# EAGLE board grabBAKUP (EAGLE 6.6.0)
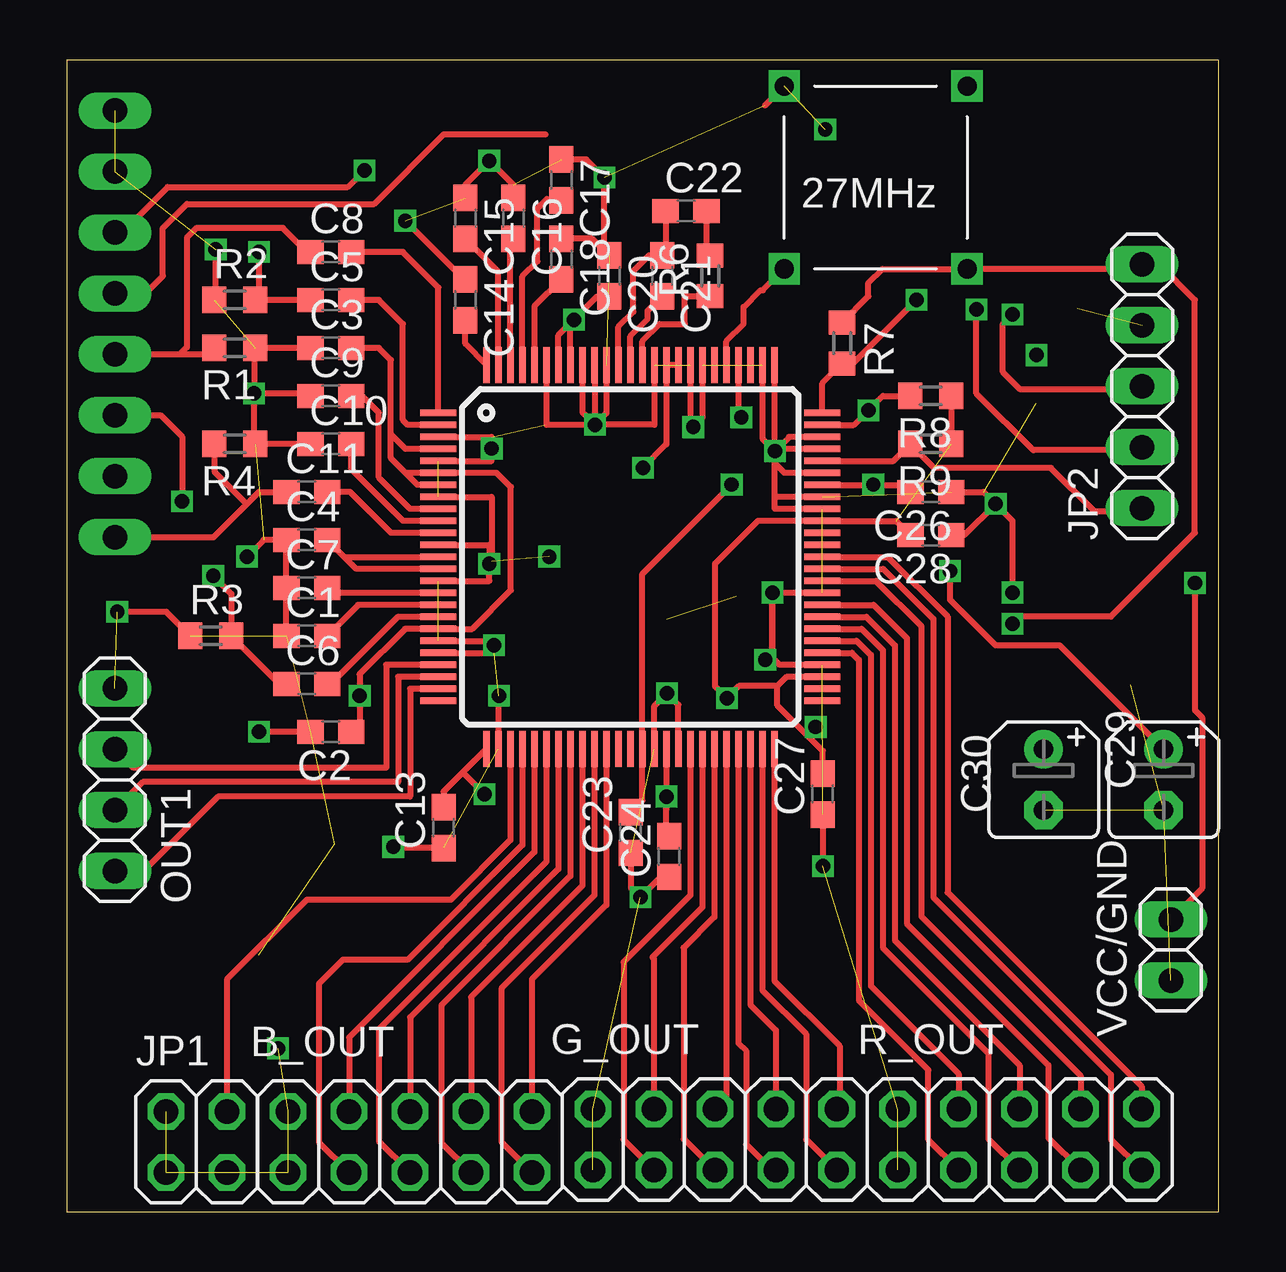
[diagram p0: board, top side]
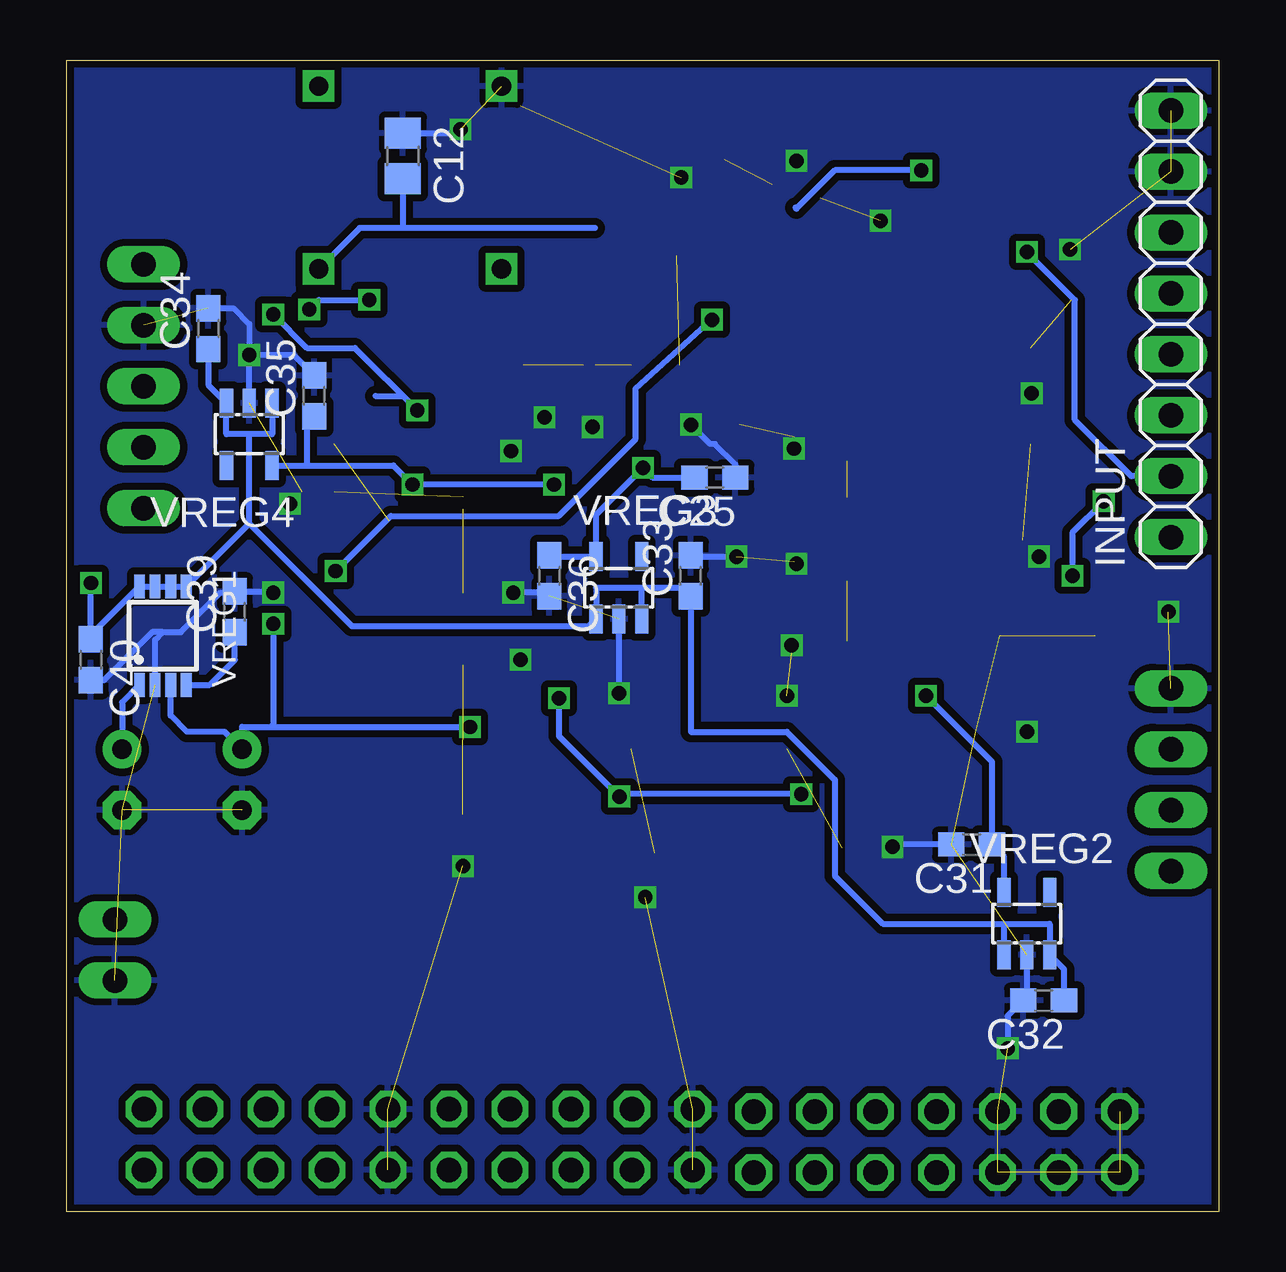
[diagram p1: board, bottom side, seen from below]

Size 48 x 48 mm. Coordinates in mm from the lower left corner, seen from the top.
Outline: 0,0 48,0 48,48 0,48 0,0
Copper layers (1*16): Top 0.035mm / dielectric 1.5mm / Bottom 0.035mm
Design rules "SeeedStudio_2layer_DRU_no_angle_20140221": minimum track width 6mil, minimum drill 12mil, track to track 6mil, track to pad 6mil, pad to pad 6mil, via to via 6mil, smd to smd 0mil, copper to edge 10mil, drill to drill 10mil, minimum pad ring 10mil, minimum via ring 6mil, stop-mask expansion 2mil, vias tented up to drill 100mil, thermal gap 10mil

## Footprints (pad centres in the part's own frame; a part is rotated, then mirrored left to right if it is on the bottom)
DIP4 = drill 0.8 square: P1 -3.81,-3.81; P4 3.81,-3.81; P5 3.81,3.81; P8 -3.81,3.81
2X05 = drill 1.016 octagon: 1 -5.08,-1.27; 2 -5.08,1.27; 3 -2.54,-1.27; 4 -2.54,1.27; 5 0,-1.27; 6 0,1.27; 7 2.54,-1.27; 8 2.54,1.27; 9 5.08,-1.27; 10 5.08,1.27
C0603 = smd 1.1 x 1: 1 -0.85,0; 2 0.85,0
C0805 = smd 1.3 x 1.5: 1 -0.95,0; 2 0.95,0
B45181A = drill 0.813 pad 1.6: + -1.27,0 | drill 0.813 pad 1.6 octagon: - 1.27,0
1X08 = drill 1.016 long: 1 -8.89,0; 2 -6.35,0; 3 -3.81,0; 4 -1.27,0; 5 1.27,0; 6 3.81,0; 7 6.35,0; 8 8.89,0
2X02 = drill 1.016 octagon: 1 -1.27,-1.27; 2 -1.27,1.27; 3 1.27,-1.27; 4 1.27,1.27
1X05 = drill 1.016 long: 1 -5.08,0; 2 -2.54,0; 3 0,0; 4 2.54,0; 5 5.08,0
1X04 = drill 1.016 long: 1 -3.81,0; 2 -1.27,0; 3 1.27,0; 4 3.81,0
R0603 = smd 1 x 1.1: 1 -0.85,0; 2 0.85,0
TQFP100 = smd 1.5 x 0.274: 1 -8,6; 2 -8,5.5; 3 -8,5; 4 -8,4.5; 5 -8,4; 6 -8,3.5; 7 -8,3; 8 -8,2.5; 9 -8,2; 10 -8,1.5; 11 -8,1; 12 -8,0.5; 13 -8,0; 14 -8,-0.5; 15 -8,-1; 16 -8,-1.5; 17 -8,-2; 18 -8,-2.5; 19 -8,-3; 20 -8,-3.5; 21 -8,-4; 22 -8,-4.5; 23 -8,-5; 24 -8,-5.5; 25 -8,-6; 51 8,-6; 52 8,-5.5; 53 8,-5; 54 8,-4.5; 55 8,-4; 56 8,-3.5; 57 8,-3; 58 8,-2.5; 59 8,-2; 60 8,-1.5; 61 8,-1; 62 8,-0.5; 63 8,0; 64 8,0.5; 65 8,1; 66 8,1.5; 67 8,2; 68 8,2.5; 69 8,3; 70 8,3.5; 71 8,4; 72 8,4.5; 73 8,5; 74 8,5.5; 75 8,6 | smd 0.274 x 1.5: 26 -6,-8; 27 -5.5,-8; 28 -5,-8; 29 -4.5,-8; 30 -4,-8; 31 -3.5,-8; 32 -3,-8; 33 -2.5,-8; 34 -2,-8; 35 -1.5,-8; 36 -1,-8; 37 -0.5,-8; 38 0,-8; 39 0.5,-8; 40 1,-8; 41 1.5,-8; 42 2,-8; 43 2.5,-8; 44 3,-8; 45 3.5,-8; 46 4,-8; 47 4.5,-8; 48 5,-8; 49 5.5,-8; 50 6,-8; 76 6,8; 77 5.5,8; 78 5,8; 79 4.5,8; 80 4,8; 81 3.5,8; 82 3,8; 83 2.5,8; 84 2,8; 85 1.5,8; 86 1,8; 87 0.5,8; 88 0,8; 89 -0.5,8; 90 -1,8; 91 -1.5,8; 92 -2,8; 93 -2.5,8; 94 -3,8; 95 -3.5,8; 96 -4,8; 97 -4.5,8; 98 -5,8; 99 -5.5,8; 100 -6,8
1X02 = drill 1.016 long: 1 -1.27,0; 2 1.27,0
MSOP8 = smd 0.45 x 1: 1 -0.975,-2.05; 2 -0.325,-2.05; 3 0.325,-2.05; 4 0.975,-2.05; 5 0.975,2.05; 6 0.325,2.05; 7 -0.325,2.05; 8 -0.975,2.05
SOT23-5L = smd 0.55 x 1.2: 1 -0.95,-1.3; 2 0,-1.3; 3 0.95,-1.3; 4 0.95,1.3; 5 -0.95,1.3

## Placement (x,y rotation side)
27MHZ  ACHL-27MHZ-EK  [DIP4]  33.7,43.1 180 top
B_OUT  [2X05]  14.3,2.9 180 top
C1  10n  [C0603]  10,24 0 top
C2  0.1u  [C0603]  11,20 180 top
C3  10n  [C0603]  11,36 0 top
C4  0.1u  [C0603]  10,28 0 top
C5  0.1u  [C0603]  11,38 0 top
C6  0.1u  [C0603]  10,22 0 top
C7  10n  [C0603]  10,26 0 top
C8  1n  [C0603]  11,40 0 top
C9  10n  [C0603]  11,34 0 top
C10  10n  [C0603]  11,32 0 top
C11  0.1u  [C0603]  10,30 0 top
C12  10n  [C0805]  34,44 270 bottom
C13  0.1u  [C0603]  15.7,16 90 top
C14  10n  [C0603]  16.6,38 270 top
C15  1n  [C0603]  16.6,41.4 270 top
C16  10n  [C0603]  18.6,41.4 270 top
C17  1n  [C0603]  20.6,43 270 top
C18  10n  [C0603]  20.6,39.7 270 top
C20  0.1u  [C0603]  22.6,39 270 top
C21  4.7n  [C0603]  24.8,39 270 top
C22  0.1u  [C0603]  25.8,41.7 0 top
C23  0.1u  [C0603]  23.5,15.8 90 top
C24  0.1u  [C0603]  25.1,14.8 90 top
C25  0.1u  [C0603]  21,30.6 180 bottom
C26  0.1u  [C0603]  36,30 180 top
C27  0.1u  [C0603]  31.5,17.4 90 top
C28  0.1u  [C0603]  36,28.2 180 top
C29  2.2u  [B45181A]  45.7,18 270 top
C30  2.2u  [B45181A]  40.7,18 270 top
C31  1u  [C0603]  10.3,15.3 180 bottom
C32  1u  [C0603]  7.3,8.8 180 bottom
C33  1u  [C0603]  22,26.5 90 bottom
C34  1u  [C0603]  42.1,36.8 90 bottom
C35  1u  [C0603]  37.7,34 90 bottom
C36  1u  [C0603]  27.9,26.5 270 bottom
C39  470p  [C0603]  41,25 90 bottom
C40  1u  [C0603]  47,23 270 bottom
G_OUT  [2X05]  27,3 180 top
INPUT  [1X08]  2,37 90 bottom
JP1  [2X02]  5.4,2.9 0 top
JP2  [1X05]  44.8,34.4 90 top
OUT1  [1X04]  2,18 90 top
R1  75  [R0603]  7,36 180 top
R2  75  [R0603]  7,38 0 top
R3  75  [R0603]  6,24 0 top
R4  75  [R0603]  7,32 180 top
R6  1.5k  [R0603]  26.8,39 90 top
R7  2.2k  [R0603]  32.3,36.2 270 top
R8  2.2k  [R0603]  36,34 180 top
R9  2.2k  [R0603]  36,32 180 top
R_OUT  [2X05]  39.7,3 180 top
TVP7002  TVP7002  [TQFP100]  23.48,27.29 0 top
VCC/GND  [1X02]  46,10.9 90 top
VREG1  MIC5210MSOP8  [MSOP8]  44,24 0 bottom
VREG2  TLV70019SOT23-5L  [SOT23-5L]  8,12 0 bottom
VREG3  TLV70019SOT23-5L  [SOT23-5L]  25,26 0 bottom
VREG4  TLV70019SOT23-5L  [SOT23-5L]  40.4,32.4 180 bottom

## Library data of the parts
27MHZ TVP7002 VREG1-VREG4 = buffiscreengrab
B_OUT G_OUT INPUT JP1 JP2 OUT1 R_OUT VCC/GND = pinhead
C1-C11 C13-C18 C20-C36 C39 C40 R1-R4 R6-R9 = resistor
C12 = rcl

## Nets
+5V: C32.1 C33.1 C34.1 C40.1 VCC/GND.2 VREG1.5 VREG1.6 VREG1.7 VREG1.8 VREG2.1 VREG2.3 VREG3.1 VREG3.3 VREG4.1 VREG4.3
A33VDD: C20.2 C29.+ TVP7002.93 TVP7002.94 VREG1.1
AVDD: C2.1 C3.2 C31.1 TVP7002.4 TVP7002.6 TVP7002.7 TVP7002.19 VREG2.5
B0: B_OUT.1 TVP7002.36
B1: B_OUT.2 TVP7002.35
B2: B_OUT.3 TVP7002.34
B3: B_OUT.4 TVP7002.33
B4: B_OUT.5 TVP7002.32
B5: B_OUT.6 TVP7002.31
B6: B_OUT.7 TVP7002.30
B7: B_OUT.8 TVP7002.29
BIN: C6.1 INPUT.3 R3.2
CLK27: 27MHZ.P5 TVP7002.80
CSYNCIN: C8.1 INPUT.4 R1.2
DVDD: C23.2 C26.2 C35.1 TVP7002.39 TVP7002.69 VREG4.5
FIDOUT: OUT1.3 TVP7002.22
G0: G_OUT.1 TVP7002.50
G1: G_OUT.2 TVP7002.49
G2: G_OUT.3 TVP7002.48
G3: G_OUT.4 TVP7002.47
G4: G_OUT.5 TVP7002.46
G5: G_OUT.6 TVP7002.45
G6: G_OUT.7 TVP7002.44
G7: G_OUT.8 TVP7002.43
GIN: C5.1 INPUT.2 R2.2
GND: 27MHZ.P4 B_OUT.9 B_OUT.10 C1.1 C2.2 C3.1 C4.1 C7.1 C9.1 C10.1 C12.1 C13.1 C14.1 C15.1 C16.1 C17.1 C18.1 C20.1 C23.1 C24.1 C25.1 C26.1 C27.1 C28.1 C29.- C30.- C31.2 C32.2 C33.2 C34.2 C35.2 C36.2 C39.2 C40.2 G_OUT.9 G_OUT.10 INPUT.7 INPUT.8 JP1.1 JP1.2 JP1.3 JP2.4 OUT1.4 R1.1 R2.1 R3.1 R4.1 R_OUT.9 R_OUT.10 TVP7002.3 TVP7002.5 TVP7002.8 TVP7002.12 TVP7002.15 TVP7002.20 TVP7002.21 TVP7002.27 TVP7002.40 TVP7002.42 TVP7002.54 TVP7002.60 TVP7002.67 TVP7002.68 TVP7002.70 TVP7002.72 TVP7002.73 TVP7002.76 TVP7002.77 TVP7002.78 TVP7002.79 TVP7002.81 TVP7002.82 TVP7002.83 TVP7002.86 TVP7002.90 TVP7002.91 TVP7002.92 TVP7002.95 VCC/GND.1 VREG1.2 VREG2.2 VREG3.2 VREG4.2
HSOUT: OUT1.1 TVP7002.24
HSYNCIN: INPUT.6
IOVDD: 27MHZ.P8 C12.2 C13.2 C24.2 C27.2 C28.2 C30.+ JP2.5 R7.1 R8.1 R9.1 TVP7002.26 TVP7002.41 TVP7002.53 TVP7002.66 VREG1.3
N$1: C8.2 TVP7002.1
N$2: C5.2 TVP7002.2
N$3: C11.2 TVP7002.11
N$5: C7.2 TVP7002.16
N$6: C14.2 TVP7002.100
N$7: C15.2 TVP7002.99
N$8: C16.2 TVP7002.98
N$9: C9.2 TVP7002.9
N$10: C10.2 TVP7002.10
N$11: C1.2 TVP7002.17
N$12: C6.2 TVP7002.18
N$13: C17.2 TVP7002.97
N$14: C18.2 TVP7002.96
N$15: C39.1 VREG1.4
N$16: C4.2 TVP7002.13 TVP7002.14
N$28: C21.2 TVP7002.88
N$29: R6.1 TVP7002.87
N$34: C22.2 R6.2
N$35: C21.1 C22.1 TVP7002.89
PCLK: JP1.4 TVP7002.28
PLL_VDD: C25.2 C36.1 TVP7002.84 TVP7002.85 VREG3.5
R0: R_OUT.1 TVP7002.63
R1: R_OUT.2 TVP7002.62
R2: R_OUT.3 TVP7002.61
R3: R_OUT.4 TVP7002.59
R4: R_OUT.5 TVP7002.58
R5: R_OUT.6 TVP7002.57
R6: R_OUT.7 TVP7002.56
R7: R_OUT.8 TVP7002.55
RESET: JP2.1 R9.2 TVP7002.71
RIN: C11.1 INPUT.1 R4.2
SCL: JP2.3 R8.2 TVP7002.74
SDA: JP2.2 R7.2 TVP7002.75
VSOUT: OUT1.2 TVP7002.23
VSYNCIN: INPUT.5

## Tracks (layer width: path | path; a pad name or v marks a point on that pad's centre or on a via)
+5V  (via drill 0.6)
  Top 0.254: v47,26.2 47,20.9 47.3,20.6 47.3,13.47 VCC/GND.2
  Bottom 0.254: VREG1.8 VREG1.7 VREG1.6 VREG1.5 40.4,28.68 | VREG1.8 45.17,25.85 | VREG2.1 8.95,12 | 8.95,12 7.05,12 VREG2.3 6.45,10.1 C32.1 | VREG3.3 24.05,26 | 24.05,26 25.95,26 VREG3.1 26.25,24.4 36.12,24.4 40.4,28.68 | 24.05,26 22,26 C33.1 22,20 18,20 16,18 16,14 14,12 8.95,12 | VREG4.1 39.45,32.4 40.4,32.4 | 40.4,32.4 41.35,32.4 VREG4.3 42.1,34.45 C34.1 | 40.4,28.68 40.4,32.4 | VREG1.8 47,24.02 C40.1 v47,26.2
A33VDD  (via drill 0.6)
  Top 0.254: TVP7002.94 20.48,36.53 v21.12,37.17 | C29.+ 41.37,23.6 38.7,23.6 36.8,25.5 v36.8,26.7 | TVP7002.93 20.98,37.03 v21.12,37.17 | C20.2 22.1,38.15 v21.12,37.17
  Bottom 0.254: VREG1.1 45.7,21.23 C29.+ | v36.8,26.7 34.5,29 27.5,29 24.3,32.2 24.3,34.3 v21.12,37.17
AVDD  (via drill 0.6)
  Top 0.254: TVP7002.4 14.11,31.79 13.5,32.4 | 13.5,32.4 13.5,35.5 13,36 C3.2 | 14.11,30.79 TVP7002.6 17.91,30.79 18.5,30.2 18.5,25.9 16.89,24.29 TVP7002.19 14.09,24.29 12.2,22.4 v12.2,21.5 12.2,20.35 C2.1 | 14.11,30.79 13.5,31.4 13.5,32.4 | TVP7002.7 14.61,30.29 14.11,30.79
  Bottom 0.254: VREG2.5 8.95,14.8 C31.1 9.45,18.75 v12.2,21.5
B0
  Top 0.254: TVP7002.36 22.48,12.78 19.38,9.68 B_OUT.1
B1
  Top 0.254: TVP7002.35 21.98,13.18 18.1,9.3 18.1,2.91 B_OUT.2
B2
  Top 0.254: TVP7002.34 21.48,13.58 16.84,8.94 B_OUT.3
B3
  Top 0.254: TVP7002.33 20.98,13.98 15.6,8.6 15.6,2.87 B_OUT.4
B4
  Top 0.254: TVP7002.32 20.48,14.28 14.3,8.1 B_OUT.5
B5
  Top 0.254: TVP7002.31 19.98,14.58 13,7.6 13,2.93 B_OUT.6
B6
  Top 0.254: TVP7002.30 19.48,14.98 11.76,7.26 B_OUT.7
B7
  Top 0.254: TVP7002.29 18.98,15.28 14.2,10.5 11.5,10.5 10.5,9.5 10.5,2.89 B_OUT.8
BIN  (via drill 0.6)
  Top 0.254: INPUT.3 3.91,33.19 4.8,32.3 v4.8,29.6 | v6.1,26.5 6.85,25.75 R3.2 8.85,22 C6.1
  Bottom 0.254: v4.8,29.6 6.1,28.3 v6.1,26.5
CLK27
  Top 0.254: TVP7002.80 27.48,36.28 28.2,37 28.2,37.7 28.9,38.4 29,38.4 27MHZ.P5
CSYNCIN
  Top 0.254: INPUT.4 4.7,35.73 | 4.7,35.73 5.88,35.73 R1.2 | C8.1 10,40 9,41 5.4,41 5,40.6 5,36.03 4.7,35.73
DVDD  (via drill 0.6)
  Top 0.254: TVP7002.69 v33.6,30.29 | v33.6,30.29 34.86,30.29 C26.2 | C23.2 23.98,17.13 TVP7002.39 23.98,26.58 v27.7,30.3 | v33.6,30.3 v33.6,30.29
  Bottom 0.254: VREG4.5 38,31.1 | 38,31.1 34.4,31.1 v33.6,30.3 v27.7,30.3 | C35.1 38,32.85 38,31.1
FIDOUT
  Top 0.254: TVP7002.22 13.3,22.79 13.3,18.5 2.77,18.5 OUT1.3
G0
  Top 0.254: TVP7002.50 29.48,9.62 32.2,6.9 32.2,4.39 G_OUT.1
G1
  Top 0.254: TVP7002.49 28.98,9.22 30.8,7.4 30.8,3.01 G_OUT.2
G2
  Top 0.254: TVP7002.48 28.48,8.62 29.54,7.56 G_OUT.3
G3
  Top 0.254: TVP7002.47 27.98,7.02 28.3,6.7 28.3,2.8 29.37,1.73 G_OUT.4
G4
  Top 0.254: TVP7002.46 27.48,4.75 G_OUT.5
G5
  Top 0.254: TVP7002.45 26.98,12.28 25.7,11 25.7,3.03 G_OUT.6
G6
  Top 0.254: TVP7002.44 26.48,12.68 24.4,10.6 24.46,10.54 G_OUT.7
G7
  Top 0.254: TVP7002.43 25.98,13.18 23.2,10.4 23.2,2.99 G_OUT.8
GIN  (via drill 0.6)
  Top 0.254: C5.1 R2.2 8,38.15 v8,40
  Bottom 0.254: INPUT.2 3.65,30.65 6,33 6,38 v8,40
GND  (via drill 0.6)  (44 unrouted)
  Top 0.254: TVP7002.5 17.7,31.29 v17.7,31.8 17.7,32.29 TVP7002.3 | TVP7002.8 17.7,29.79 17.7,27.1 v17.6,27 | TVP7002.12 17.6,27.79 v17.6,27 | TVP7002.15 17.6,26.29 v17.6,27 | TVP7002.20 17.8,23.79 v17.8,23.6 17.8,23.29 TVP7002.21 | TVP7002.27 18,19.29 v18,21.5 | C3.1 R1.1 7.8,35.95 v7.8,34.1 | C9.1 10.05,34.1 v7.8,34.1 | C10.1 R4.1 7.8,32.05 v7.8,34.1 | R2.1 6.2,38.05 v6.2,40.1 | C1.1 C7.1 C4.1 8.2,28 v7.5,27.3 | R3.1 4.15,25 v2.1,25 | TVP7002.91 22,35.27 v22,32.8 | TVP7002.92 21.48,33.32 v22,32.8 | TVP7002.90 22.48,33.28 v22,32.8 | TVP7002.95 19.98,32.8 v22,32.8 | C16.1 18.6,42.8 v17.6,43.8 16.6,42.8 C15.1 | C14.1 16.55,38.85 v14.1,41.3 | TVP7002.86 24.48,32.8 v22,32.8 | TVP7002.83 25.98,32.82 v26.1,32.7 26.48,33.08 TVP7002.82 | TVP7002.72 29.59,31.79 v29.5,31.7 | TVP7002.73 30.09,32.29 v29.5,31.7 | TVP7002.70 29.91,30.79 29.5,31.2 v29.5,31.7 | TVP7002.67 29.5,29.29 v29.5,31.7 | TVP7002.68 29.5,29.79 v29.5,31.7 | TVP7002.60 v29.4,25.79 v29.4,25.8 | TVP7002.76 29.48,31.72 v29.5,31.7 | TVP7002.77 28.98,32.22 v29.5,31.7 | TVP7002.79 27.98,33.22 v28.1,33.1 | 27MHZ.P4 29.08,46.1 | C13.1 13.65,15.15 v13.6,15.2 | TVP7002.42 25.48,21.12 v25,21.6 24.48,21.08 TVP7002.40 | 25.1,14.3 C24.1 24.75,13.95 v23.9,13.1 23.5,13.5 C23.1 | C27.1 v31.5,14.4 | C2.2 v8,20 | C26.1 38.2,30 v38.7,29.5 | C28.1 37.4,28.2 v38.7,29.5 | C18.1 21.9,40.55 C20.1 22.4,40.25 v22.4,43.1 21.65,43.85 C17.1 | TVP7002.54 29.71,22.79 29.4,23.1 v29.4,25.8 | v29.4,25.8 29.4,23.3 v29.1,23 | v38.7,29.5 39.4,28.8 v39.4,25.8
  Bottom 0.254: C25.1 20.15,31.15 21,32 21.2,32 v22,32.8 | C12.1 31.75,44.95 v31.6,45.1 | 44,24.15 43.25,24.15 41.6,25.8 41.05,25.8 C39.2 39.45,25.85 v39.4,25.8 | VREG1.2 44.33,23.82 44,24.15 | VREG2.2 8,8.95 C32.2 8.8,8.15 v8.8,6.8 | C31.2 13.5,15.3 v13.6,15.2 | VREG3.2 v25,21.6 | C33.2 22,27.3 v20.1,27.3 | C36.2 27.9,25.8 v29.4,25.8 | VREG4.2 v40.4,35.7 | C35.2 38.55,35.7 v40.4,35.7 | C34.2 41.05,37.65 40.4,37 v40.4,35.7 | 44,24.15 44.45,24.15 46.45,22.15 C40.2 | v29.1,23 29.1,23.2
  pour Bottom (isolate 0.305): 0,48 48,48 48,0 0,0
HSOUT
  Top 0.254: TVP7002.24 14.3,21.79 14.3,17.3 6.3,17.3 3,14 2.19,14 OUT1.1
HSYNCIN  (via drill 0.6)
  Top 0.254: v12.4,43.4 11.7,42.7 4.2,42.7 2.31,40.81 INPUT.6
  Bottom 0.254: v12.4,43.4 16,43.4 17.6,41.8 17.65,41.85
IOVDD  (via drill 0.6)  (1 unrouted)
  Top 0.254: R8.1 R9.1 | TVP7002.26 16.54,18.35 | 16.54,18.35 15.7,17.51 C13.2 | TVP7002.41 v24.98,17.3 | v24.98,17.3 24.98,16.77 | C27.2 31.5,19.2 30.85,19.85 | 30.85,19.85 29.6,21.1 29.6,21.9 | 29.6,21.9 30,22.3 TVP7002.53 | v31.2,20.2 30.85,19.85 | C28.2 34.56,28.79 TVP7002.66 28.79,28.79 27,27 27,21.9 v27.5,21.4 28,21.9 29.6,21.9 | 16.54,18.35 16.54,18.26 v17.4,17.4 | C24.2 24.98,15.77 v24.98,17.3 | v39.4,24.5 39.7,24.8 43.5,24.8 47,28.3 47,38 45.52,39.48 JP2.5 44.61,39.29 27MHZ.P8 33.99,39.29 33.4,38.7 33.4,38.15 R7.1
  Bottom 0.254: 26,41 34,41 | 34,41 35.8,41 27MHZ.P8 | C12.2 34,41 | VREG1.3 43.67,20.68 43,20 41.43,20 C30.+ 40.7,20.2 39.5,20.2 | 39.5,20.2 v31.2,20.2 | v17.4,17.4 24.88,17.4 v24.98,17.3 27.5,19.82 v27.5,21.4 | v39.4,24.5 39.4,20.3 39.5,20.2
N$1
  Top 0.254: TVP7002.1 15.48,38.52 14,40 C8.2
N$2
  Top 0.254: TVP7002.2 14.21,32.79 14,33 14,37 13,38 C5.2
N$3
  Top 0.254: TVP7002.11 13.51,28.29 11.8,30 C11.2
N$5
  Top 0.254: TVP7002.16 11.06,25.79 C7.2
N$6
  Top 0.254: TVP7002.100 16.6,36.17 C14.2
N$7
  Top 0.254: TVP7002.99 17.98,39.17 C15.2
N$8
  Top 0.254: TVP7002.98 18.48,40.43 C16.2
N$9
  Top 0.254: TVP7002.9 14.31,29.29 13,30.6 13,33.3 12.3,34 C9.2
N$10
  Top 0.254: TVP7002.10 14.01,28.79 11.85,30.95 C10.2
N$11
  Top 0.254: TVP7002.17 12.14,25.29 C1.2
N$12
  Top 0.254: TVP7002.18 13.79,24.79 11,22 C6.2
N$13
  Top 0.254: TVP7002.97 18.98,38.98 19.6,39.6 19.6,41.8 20,42.2 20.55,42.2 C17.2
N$14
  Top 0.254: C18.2 19.48,37.73 TVP7002.96
N$15
  Bottom 0.254: VREG1.4 42.05,21.95 41,23 C39.1
N$16
  Top 0.254: TVP7002.14 12.06,26.79 C4.2 11.56,27.29 TVP7002.13
N$28
  Top 0.254: TVP7002.88 23.48,36.48 24.2,37.2 24.2,37.55 C21.2
N$29
  Top 0.254: TVP7002.87 23.98,36.28 24.7,37 25.75,37 25.75,38.15 R6.1
N$34
  Top 0.254: C22.2 26.65,39.85 R6.2
N$35
  Top 0.254: C22.1 24.95,39.85 C21.1 24.25,39.85 23.6,39.2 23.6,37.5 22.98,36.88 TVP7002.89
PCLK
  Top 0.254: TVP7002.28 18.48,15.48 16,13 10,13 6.67,9.67 JP1.4
PLL_VDD  (via drill 0.6)
  Top 0.254: v24,31 24.98,31.98 TVP7002.85 TVP7002.84
  Bottom 0.254: C25.2 23.6,30.6 v24,31 25.95,29.05 VREG3.5 27.9,27.3 C36.1
R0
  Top 0.254: TVP7002.63 34.21,27.29 36.7,24.8 36.7,13.3 44.78,5.22 R_OUT.1
R1
  Top 0.254: TVP7002.62 34.01,26.79 36.1,24.7 36.1,13.1 43.5,5.7 43.5,3 43.51,3 R_OUT.2
R2
  Top 0.254: TVP7002.61 33.71,26.29 35.6,24.4 35.6,12.3 42.24,5.66 R_OUT.3
R3
  Top 0.254: TVP7002.59 33.61,25.29 35,23.9 35,12 40.9,6.1 40.9,3.07 R_OUT.4
R4
  Top 0.254: TVP7002.58 33.31,24.79 34.5,23.6 34.5,11.3 39.7,6.1 R_OUT.5
R5
  Top 0.254: TVP7002.57 33.11,24.29 34,23.4 34,11 38.4,6.6 38.4,3.03 R_OUT.6
R6
  Top 0.254: TVP7002.56 32.91,23.79 33.5,23.2 33.5,9.4 37.16,5.74 R_OUT.7
R7
  Top 0.254: R_OUT.8 35.9,2.99 35.9,5.9 33,8.8 33,23 32.71,23.29 TVP7002.55
RESET
  Top 0.254: TVP7002.71 34.44,31.29 R9.2 36.15,31 41,31 42.81,29.19 44.67,29.19 JP2.1
RIN
  Top 0.254: INPUT.1 6.11,28.11 7.5,29.5 | 7.5,29.5 8,30 C11.1 | R4.2 6.15,30.85 7.5,29.5
SCL  (via drill 0.6)
  Top 0.254: TVP7002.74 32.79,32.79 v33.4,33.4 34,34 R8.2 | v39.4,37.4 39,37 39,35 39.73,34.27 44.67,34.27 JP2.3
  Bottom 0.254: R8.2 34,34 v33.4,33.4 36,36 38,36 v39.4,37.4
SDA  (via drill 0.6)
  Top 0.254: v37.9,37.6 37.9,34.1 40.27,31.73 44.67,31.73 JP2.2 | TVP7002.75 31.48,34.53 R7.2 32.75,35.35 v35.4,38
  Bottom 0.254: v37.9,37.6 37.5,38 v35.4,38
VSOUT
  Top 0.254: TVP7002.23 13.8,22.29 13.8,17.9 3.17,17.9 OUT1.2
VSYNCIN
  Top 0.254: INPUT.5 3.27,38.27 4,39 4,41 5,42 12.8,42 15.7,44.9 19.95,44.9